# Altium PCB PCB1.PcbDoc
Units mm, origin at the board's own origin, x right, y up, seen from the top; angles counter-clockwise.
Board outline 60.07 x 31.75 mm, 2 copper layers (Top Layer, Bottom Layer); 35 components, 50 nets, 194 pads, 54 vias.
Unrouted connection lines stored in the file: 11.
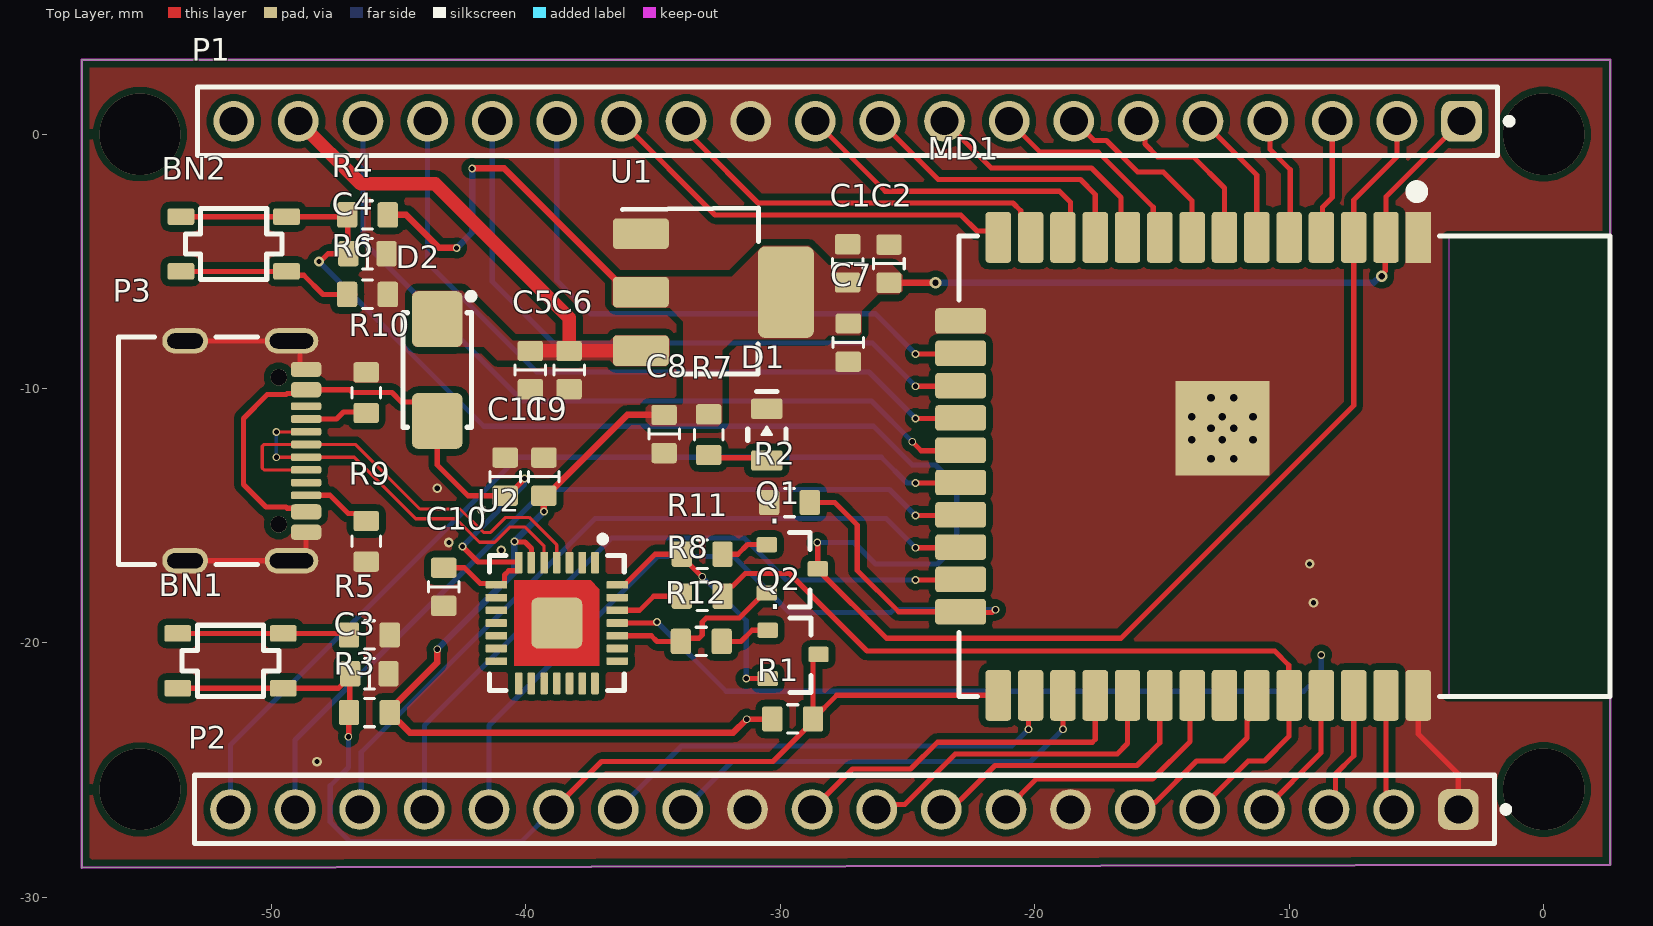
[diagram p0: Top Layer view]
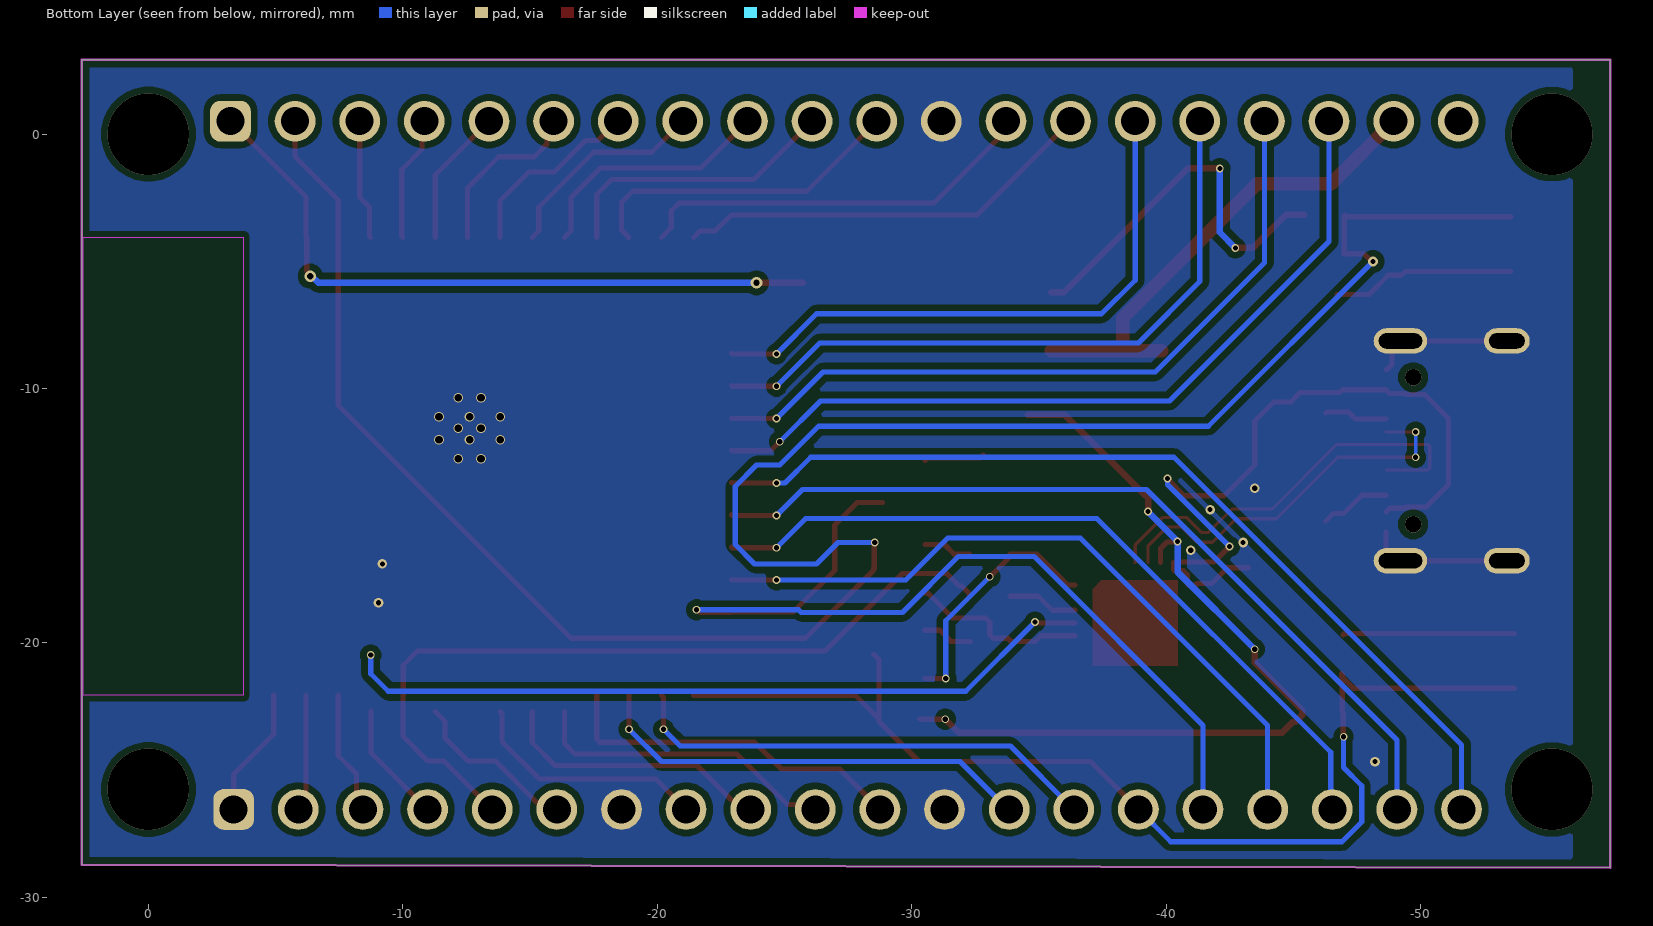
[diagram p1: Bottom Layer view, seen from below]
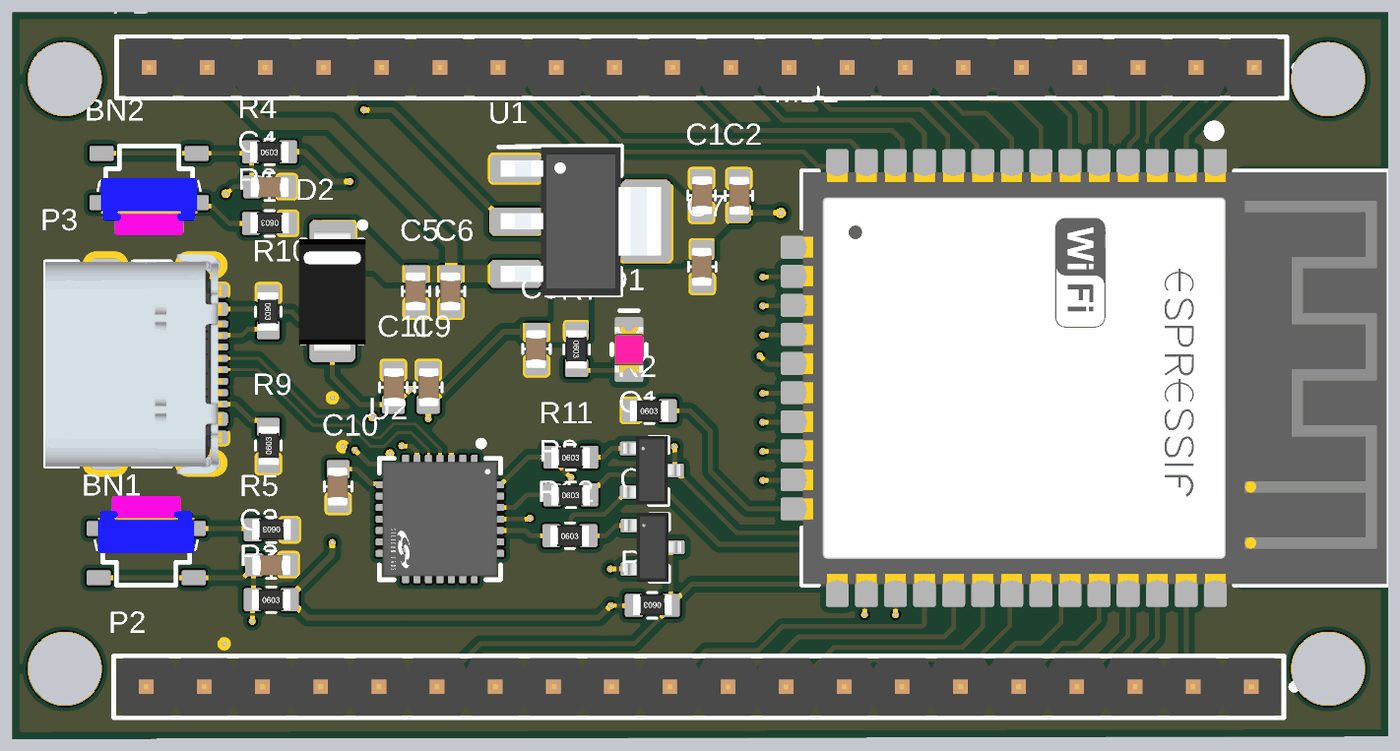
[diagram p2: 3D render of the assembled board from above, using the file's embedded part models]

## Layer stack, top to bottom
Top Solder: solder mask 0.0102, Solder Resist, Dk 3.5
Top Layer: signal copper 0.0356
Dielectric 1: dielectric 0.32, FR-4, Dk 4.8
Bottom Layer: signal copper 0.0356
Bottom Solder: solder mask 0.0102, Solder Resist, Dk 3.5

## Board outline
-57.455,-28.832 -57.455,2.921 2.616,2.921 2.616,-28.708

## Design rules (kind name [scope] priority, off if disabled: settings)
Clearance [All] p1: gap=0.254 ignorepadtopadclearanceinfootprint=FALSE
DiffPairsRouting [InDifferentialPairClass('New Class')] p1: maxlimit=0.127 minlimit=0.127 mostfreqgap=0.127 toplayer_minwidth=0.277 toplayer_maxwidth=0.277 toplayer_prefwidth=0.277 bottomlayer_minwidth=0.277 bottomlayer_maxwidth=0.277 bottomlayer_prefwidth=0.277 impedanceprofiledriven=TRUE impedanceprofileid={9CC0AA3F-7C3E-491D-B543-20747BA928EE} impedanceprofilevalue=90.000000 maxuncoupledlength=12.7
PolygonConnect [All] p1: connectstyle=Direct reliefconductorwidth=0.254 reliefentries=4 polygonreliefangle="90 Angle" airgapwidth=0.254
RoutingVias [InNetClass('All Nets')] p1: holewidth=0.203 width=0.305 viastyle="Through Hole" minholewidth=0.203 minwidth=0.305 maxholewidth=0.203 maxwidth=0.305 viatemplateguid#1={E89F5CC9-6383-4E06-893D-726549EC8DC4} viatemplatename#1=v38h30
SolderMaskExpansion [All] p1: expansion=0.102 istentingtop=FALSE
SupplyNets "Schematic Supply Nets_3" [InNet('EXT_5V')] p1: voltage=0.000
SupplyNets "Schematic Supply Nets_2" [InNet('+3V3')] p2: voltage=0.000
SupplyNets "Schematic Supply Nets_1" [InNet('GND')] p3: voltage=0.000
Width [InNetClass('50ohm')] p1: maxlimit=0.535 minlimit=0.535 preferedwidth=0.535 impedanceprofiledriven=TRUE impedanceprofileid={D5905C2B-C446-428B-AADE-5B11549CC50C} impedanceprofilevalue=50.000000 minimp=50.000000 maximp=50.000000 favimp=50.000000
29 further rules are at their usual default settings.

## Classes and differential pairs
component class Designator: BN1 BN2 C1 C2 C3 C4 MD1 P1 P2 R1 R2 R3 R4 R5 R6
differential pair D: +D_P -D_N

## Components (designator, comment, footprint, x,y, rotation, side; value= is the part's Value field where it differs from the comment)
BN1 "SKRPABE010" BTN_SKRPABE010 -51.613,-20.701 r0 top
BN2 "SKRPABE010" BTN_SKRPABE010 -51.486,-4.318 r180 top
C1 "22uF" CAP_0603 -27.356,-5.08 r270 top
C2 "0.1uF" CAP_0603 -25.73,-5.092 r270 top
C3 "1uF" CAP_0603 -46.152,-21.209 r180 top
C4 "1uF" CAP_0603 -46.228,-4.699 r180 top
C5 "10uF" CAP_0603 -39.827,-9.271 r90 top
C6 "100nF" CAP_0603 -38.303,-9.271 r90 top
C7 "10uF" CAP_0603 -27.33,-8.192 r90 top
C8 "100nF" CAP_0603 -34.569,-11.786 r90 top
C9 "1uF" CAP_0603 -39.294,-13.462 r270 top
C10 "10nF" CAP_0603 -43.231,-17.792 r90 top
C11 "100nF" CAP_0603 -40.818,-13.462 r270 top
D1 "LED RED" LED_RED_V0805 -30.531,-11.811 r90 top
D2 "SS34" DIO_SMA -43.485,-9.271 r270 top
MD1 "ESP32-WROOM-32D" MD_ESP32_WROOM_D -12.624,-11.557 r270 top
P1 "61302011121" 61302011121 -27.356,0.508 r180 top
P2 "61302011121" 61302011121 -27.483,-26.543 r180 top
P3 "USB_2.0_TYPE-C" CON_USB_2.0_TYPE-C -52.248,-12.446 r270 top
Q1 "BC846x" "BJT_ BC846x" -29.531,-17.084 r0 top
Q2 "BC846x" "BJT_ BC846x" -29.499,-20.447 r0 top
R1 "5K" RES_0603 -29.515,-22.987 r180 top
R2 "5K" RES_0603 -29.642,-14.478 r0 top
R3 "10k" RES_0603 -46.152,-22.733 r0 top
R4 "10k" RES_0603 -46.228,-3.175 r0 top
R5 "330" RES_0603 -46.152,-19.685 r180 top
R6 "330" RES_0603 -46.228,-6.299 r180 top
R7 "220" RES_0603 -32.817,-11.811 r270 top
R8 "470" RES_0603 -33.071,-18.161 r0 top
R9 "5.1K" RES_0603 -46.279,-16.002 r90 top
R10 "5.1K" RES_0603 -46.279,-10.16 r270 top
R11 "12K" RES_0603 -33.071,-16.51 r0 top
R12 "12K" RES_0603 -33.109,-19.939 r0 top
U1 "+3V3" PWR_LD1117_SOT223 -32.634,-6.209 r0 top
U2 "CP2102" INF_CP2102 -38.786,-19.215 r270 top

## Footprints (in the part's own frame and the unit in brackets; to place one, negate y for a bottom-side part, rotate by r counter-clockwise, add the part's x,y. Pads: shape width x height; smd on the part's side, far side on the other; paste and mask are expansions set on the pad)
61302011121 [mm] "Pin Header, pitch 2.54 mm, THT, Vertical, single row, 20p"
  rrect50% 1.6x1.6 hole 1.1: 1(-24.13,0)
  round 1.6 hole 1.1: 2(-21.59,0) 3(-19.05,0) 4(-16.51,0) 5(-13.97,0) 6(-11.43,0) 7(-8.89,0) 8(-6.35,0) 9(-3.81,0) 10(-1.27,0) 11(1.27,0) 12(3.81,0) 13(6.35,0) 14(8.89,0) 15(11.43,0) 16(13.97,0) 17(16.51,0) 18(19.05,0) 19(21.59,0) 20(24.13,0)
  silkscreen extent -26.12,-1.35 25.55,1.35, body extent -25.4,-1.27 25.4,1.27, height 8.57
"BJT_ BC846x" [mm]
  rrect25% 0.8x0.6 smd mask+0.05: 1(-1,0.95) 2(-1,-0.95) 3(1,0)
  silkscreen extent -0.11,-1.5 0.7,1.43, body extent -1.24,-1.5 1.24,1.5, height 1.09
BTN_SKRPABE010 [mm]
  rrect25% 1.05x0.65 smd: 12(-2.075,1.075) 12(2.075,1.075) 34(-2.075,-1.075) 34(2.075,-1.075)
  silkscreen extent -1.9,-1.4 1.9,1.4, body extent -2.3,-1.6 2.3,1.6, height 2.51
CAP_0603 [mm]
  rrect25% 0.8x1 smd: 1(-0.75,0) 2(0.75,0)
  silkscreen extent -0.2,-0.6 0.2,0.6, body extent -0.85,-0.43 0.85,0.47, height 0.9
CON_USB_2.0_TYPE-C [mm]
  rrect50% 0.6x1.2 smd: A1/B12(-3.2,3.605) A4/B9(-2.4,3.605) A9/B4(2.4,3.605) A12/B1(3.2,3.605)
  rrect50% 0.3x1.2 smd: A5(-1.25,3.605) A6(-0.25,3.605) A7(0.25,3.605) A8(1.25,3.605) B5(1.75,3.605) B6(0.75,3.605) B7(-0.75,3.605) B8(-1.75,3.605)
  round 0.65 hole 0.65 unplated: MH1(-2.89,2.535) MH2(2.89,2.535)
  oval 1x2.1 hole 0.6 slot 1.7 at 90 deg: Shell(-4.32,3.035) Shell(4.32,3.035)
  oval 1x1.8 hole 0.6 slot 1.4 at 90 deg: Shell(-4.32,-1.145) Shell(4.32,-1.145)
  silkscreen extent -4.47,-3.76 4.47,1.7, body extent -4.79,-3.76 4.79,3.95, height 3.33
DIO_SMA [mm] "Molded Diode, 2-Leads, Body 4.25x2.50mm, IPC Medium Density"
  rrect25% 2.2x2 smd: A(2,0) C(-2,0)
  silkscreen extent -3.02,-1.35 2.25,1.45, body extent -2.61,-1.46 2.67,1.46, height 2.41
INF_CP2102 [mm]
  rrect25% 0.85x0.3 smd: 1(-2.375,1.5) 2(-2.375,1) 3(-2.375,0.5) 4(-2.375,0) 5(-2.375,-0.5) 6(-2.375,-1) 7(-2.375,-1.5) 15(2.375,-1.5) 16(2.375,-1) 17(2.375,-0.5) 18(2.375,0) 19(2.375,0.5) 20(2.375,1) 21(2.375,1.5)
  rrect25% 0.3x0.85 smd: 8(-1.5,-2.375) 9(-1,-2.375) 10(-0.5,-2.375) 11(0,-2.375) 12(0.5,-2.375) 13(1,-2.375) 14(1.5,-2.375) 22(1.5,2.375) 23(1,2.375) 24(0.5,2.375) 25(0,2.375) 26(-0.5,2.375) 27(-1,2.375) 28(-1.5,2.375)
  rrect25% 2x2 smd: 29(0,0)
  Top Layer region: -1.325,1.675 1.675,1.675 1.675,-1.675 -1.675,-1.675 -1.675,1.325 -1.325,1.675
  silkscreen extent -3.42,-2.65 2.65,2.65, body extent -2.98,-2.98 2.98,2.98, height 0.25
LED_RED_V0805 [mm]
  rrect25% 0.8x1.25 smd paste+0 mask+0: A(-1.016,0) C(1.016,0)
  silkscreen extent -0.22,-0.75 1.7,0.75, body extent -1.3,-0.85 1.3,0.85, height 0.25
MD_ESP32_WROOM_D [mm]
  rect 2x1 smd paste+0 mask+0: 1(-7.5,7.7)
  rrect25% 2x1 smd paste+0 mask+0: 2(-7.5,6.43) 3(-7.5,5.16) 4(-7.5,3.89) 5(-7.5,2.62) 6(-7.5,1.35) 7(-7.5,0.08) 8(-7.5,-1.19) 9(-7.5,-2.46) 10(-7.5,-3.73) 11(-7.5,-5) 12(-7.5,-6.27) 13(-7.5,-7.54) 14(-7.5,-8.81) 25(10.5,-8.81) 26(10.5,-7.54) 27(10.5,-6.27) 28(10.5,-5) 29(10.5,-3.73) 30(10.5,-2.46) 31(10.5,-1.19) 32(10.5,0.08) 33(10.5,1.35) 34(10.5,2.62) 35(10.5,3.89) 36(10.5,5.16) 37(10.5,6.43) 38(10.5,7.7)
  rrect25% 1x2 smd paste+0 mask+0: 15(-4.215,-10.29) 16(-2.945,-10.29) 17(-1.675,-10.29) 18(-0.405,-10.29) 19(0.865,-10.29) 20(2.135,-10.29) 21(3.405,-10.29) 22(4.675,-10.29) 23(5.945,-10.29) 24(7.215,-10.29)
  rect 3.7x3.7 smd paste+0 mask+0: 39(0,0)
  Keep-Out Layer region: -7.5,8.89 10.5,8.89 10.5,15.19 -7.5,15.19
  Keep-Out Layer region: -7.5,8.89 10.5,8.89 10.5,15.19 -7.5,15.19
  silkscreen extent -9.5,-10.36 10.55,15.24, body extent -7.5,-10.31 10.5,15.19, height 3.2
PWR_LD1117_SOT223 [mm]
  rrect25% 2.2x1.2 smd: 1(-2.85,2.3) 2(-2.85,0) 3(-2.85,-2.3)
  rrect25% 2.2x3.6 smd: 4(2.85,0)
  silkscreen extent -3.57,-3.22 1.78,3.3, body extent -3.5,-3.25 3.5,3.25, height 1.8
RES_0603 [mm]
  rrect25% 0.8x1 smd: 1(-0.8,0) 2(0.8,0)
  silkscreen extent -0.2,-0.56 0.2,0.56, body extent -0.86,-0.47 0.84,0.43, height 0.56

## Part data
BN1 BN2: library part BTN_SKRPABE010, "3.2mm 2.5mm button 50mA Brick SPST 16V SMD Tactile Switches", JLCPCB Part=?, LCSC Part=?, Mfr.part=SKRPABE010
C1 C2 C3 C4 C5 C6 C7 C8 C9 C10 C11: library part CAP_0603, "0603 Multilayer Ceramic Capacitors MLCC - SMD/SMT ROHS", JLCPCB Part=?, LCSC Part=?, Mfr. Part=?, Voltage=?
D1: library part LED_RED_V0805, "20mA 615nm~630nm RED", JLCPCB Part=?, LCSC Part=?, Mrf. Part=?
D2: library part DIO_SS34, "40V 500mV@3A 3A SMC (SBD)", JLCPCB Part=?, LCSC Part=?, Mfr. Part=?
MD1: library part MD_ESP32_WROOM_D, "core ESP32-D0WD, 32Mbits, 3.3V, 40Mhz, onboard antenna", JLCPCB Part=?, LCSCPCB Part=?, Mrf. Part=?
P1 P2: library part CMP-1502-01102-3, Color=Black, Contact Resistance=20mΩ, Current Rating=3A, Operating Supply Voltage=250V, Connector Type="Male Pin", Contact Material=Copper, Contact Mating Length=5.9944mm, Contact Plating=Gold, Gender=Male, Lead Pitch=2.54mm, Mount="Through Hole", NexarPartId=32855554, Number of Contacts=20, Number of Pins=20, Number of Positions=20, Number of Rows=1, Orientation=Vertical, Packaging=Bulk, Pitch=2.54mm, REACH SVHC=Unknown, RoHS=Compliant, Termination=Solder
P3: library part CON_USB_2.0_TYPE-C, "USB Connectors USB Jack 2.0, Type-C, Horizontal SMT", JLCPCB Part=?, LCSC Part=?, Mrf. Part=?
Q1 Q2: library part "BJT_ BC846x", "Single Bipolar Transistor, NPN, 65 V, 100 mA, 250 mW, SOT23 (TO-236AB), 3 Pins, Surface Mount", JLCPCB Part=?, LCSC Part=?, Mrf. Part=?
R1 R2 R3 R4 R5 R6 R7 R8 R9 R10 R11 R12: library part RES_0603, "0603 Thick Film Resistor - Surface Mount ROHS", JLCPCB Part=?, LCSC Part=?, Mfr. Part=?
U1: library part PWR_LD1117, "Linear Voltage Regulators (LDO)", JLCPCB Part=?, LCSC Part=?, Mrf. Part=?
U2: library part INF_CP2102, "USB to UART bridge USB 2.0 3.3V, CP2102-GMR, VFQFN-28", JLCPCB Part=?, Mrf. Part=?

## Via types
v1: diameter 0.305, hole 0.203, Top Layer to Bottom Layer, 28 vias
v2: diameter 0.381, hole 0.3, Top Layer to Bottom Layer, 12 vias
v3: diameter 0.381, hole 0.203, Top Layer to Bottom Layer, 8 vias
v4: diameter 3.2, hole 3.2, Top Layer to Bottom Layer, 4 vias
v5: diameter 0.457, hole 0.254, Top Layer to Bottom Layer, 2 vias

## Nets (pads, with @x,y where several pads share a name; then routed paths per layer and width w, separated by ;. In a path a pad name is that pad's centre, name@x,y a point inside that pad or via, vN(x,y) a via of type N, cw(c..) or ccw(c..) an arc to the next point about the centre after c; other vN are vias at no path point)
+3V3: C1.2 C2.2 C7.2 C8.2 C9.2 MD1.2 P1.1 R1.2 R3.2 R4.2 R7.1 U1.2 U1.4 U2.6 | length 76.1
  Top Layer w0.203: v1(-40.451,-16.012) -40.431,-16.031 -40.039,-16.031 -39.786,-16.284 U2.6 ; v1(-31.322,-22.996) -30.324,-22.996 R1.2 ; v5(-6.365,-5.58) -6.365,-5.511 -6.223,-5.37 -6.223,-4.086 MD1.2 -6.194,-2.46 P1.1
  Top Layer w0.254: R4.2 -44.704,-3.175 -43.409,-4.47 v1(-42.723,-4.47) ; v1(-43.485,-20.244) -43.495,-20.254 -43.495,-20.776 -45.352,-22.633 R3.2 -45.352,-22.833 -45.079,-23.106 -44.979,-23.106 -44.564,-23.52 -31.845,-23.52 v1(-31.322,-22.996) ; v1(-42.113,-1.346) -40.847,-1.346 -35.984,-6.209 U1.2 ; v1(-39.294,-14.834) C9.2 ; C9.2@-39.194,-14.212 -36.017,-11.036 C8.2 ; C2.2 v5(-23.901,-5.842)
  Bottom Layer w0.254: v1(-43.485,-20.244) -40.451,-17.21 v1(-40.451,-16.012) -40.451,-16.001 -39.294,-14.844 v1(-39.294,-14.834) ; v1(-42.723,-4.47) -42.113,-3.861 v1(-42.113,-1.346) ; v5(-23.901,-5.842) -6.682,-5.842 -6.42,-5.58 v5(-6.365,-5.58)
CLK: MD1.20 P2.20 | length 36.4
  Top Layer w0.203: v1(-24.689,-13.716) -22.938,-13.716 MD1.20
  Bottom Layer w0.203: P2.20 -51.613,-24.003 -40.31,-12.7 -26.035,-12.7 -25.019,-13.716 v1(-24.689,-13.716)
CMD: MD1.19 P1.18 | length 31.6
  Top Layer w0.203: v1(-24.816,-12.09) -24.46,-12.446 -22.938,-12.446 MD1.19
  Bottom Layer w0.203: P1.18 -46.406,-4.216 -40.132,-10.49 -26.416,-10.49 v1(-24.816,-12.09)
D_N: P3.A7 P3.B7 U2.5 | length 15.3
  Top Layer w0.127: v1(-49.809,-11.709) -49.803,-11.703 -48.649,-11.703 P3.B7 ; v1@-49.807,-12.698 P3.A7@-48.645,-12.698 ; P3.A7 -46.744,-12.696 -44.327,-15.113 -42.748,-15.113 -41.826,-16.036 -41.231,-16.036 -40.638,-15.443 -40.034,-15.443 -39.286,-16.191 U2.5
  Bottom Layer w0.127: v1(-49.809,-12.7) v1(-49.809,-11.709)
D_P: P3.A6 P3.B6 U2.4 | length 17.7
  Top Layer w0.127: P3.B6@-48.647,-13.2 -50.292,-13.2 -50.366,-13.126 -50.366,-12.27 -50.292,-12.196 -46.705,-12.196 -44.169,-14.732 -42.59,-14.732 -41.668,-15.655 -41.388,-15.655 -40.796,-15.062 -39.876,-15.062 -38.775,-16.164 -38.775,-16.829 U2.4 -38.786,-16.164
DTR: Q2.2 R11.1 U2.28 | length 9.8
  Top Layer w0.203: U2.28 -36.136,-17.715 -34.931,-16.51 R11.1 -33.871,-16.61 -33.082,-17.399 v1(-33.071,-17.399) ; v1(-31.341,-21.391) -31.336,-21.397 Q2.2
  Bottom Layer w0.203: v1(-33.071,-17.399) -31.341,-19.129 v1(-31.341,-21.391)
EN: BN2.34 C4.2 MD1.3 P1.2 Q1.3 R4.1 | length 85.5
  Top Layer w0.203: BN2.34@-53.561,-3.243 -49.411,-3.243 -47.096,-3.243 R4.1 -47.003,-3.2 -47.003,-4.674 C4.2 -47.78,-4.699 -48.085,-5.004 v3(-48.133,-5.004) ; v1(-28.55,-16.053) -28.531,-16.072 Q1.3 -28.499,-17.052 -28.499,-17.145 -25.832,-19.812 -16.612,-19.812 -7.464,-10.664 MD1.3 -7.464,-2.587 -5.766,-0.889 P1.2
  Bottom Layer w0.203: v3(-48.133,-5.004) -41.656,-11.481 -26.34,-11.481 -24.816,-13.005 -23.901,-13.005 -23.063,-13.843 -23.063,-16.129 -23.825,-16.891 -26.264,-16.891 -27.102,-16.053 v1(-28.55,-16.053)
EXT_5V: C5.2 C6.2 D2.C P1.19 P1.20 U1.3 | length 19.5
  Top Layer w0.533: P1.19 -46.482,-1.956 -43.561,-1.956 -38.303,-7.214 C6.2 ; C5.2 C6.2 ; U1.3 -35.49,-8.515 -38.297,-8.515 C6.2
GND: C1.1 C2.1 C3.1 C4.1 C5.1 C6.1 C7.1 C8.1 C9.1 C10.1 C11.1 D1.C MD1.1 MD1.15 MD1.38 MD1.39 P1.12 P2.1 P2.7 P2.12 P3.A1/B12 P3.A12/B1 P3.Shell R2.1 R5.1 R6.1 R9.1 R10.1 U1.1 U2.3 | length 16.4
  Top Layer w0.203: P3.Shell@-53.393,-16.766 -49.213,-16.766 -49.011,-16.766 -48.643,-16.398 P3.A12/B1 ; P3.Shell@-53.393,-8.126 -49.213,-8.126 -48.878,-8.461 -48.878,-9.051 -48.683,-9.246 P3.A1/B12 ; MD1.38 -4.924,-23.575 -3.353,-25.146 P2.1
  other v2: -13.074,-12.757 -12.174,-12.757 -13.824,-12.007 -12.624,-12.007 -11.424,-12.007 -13.074,-11.557 -12.174,-11.557 -13.824,-11.107 -12.624,-11.107 -11.424,-11.107 -13.074,-10.357 -12.174,-10.357
  other v3: -48.209,-24.663 -9.042,-18.415 -9.195,-16.891 -40.97,-16.358 -43.028,-16.053 -41.732,-14.757 -43.485,-13.919
IO0: BN1.34 C3.2 MD1.25 P2.15 Q2.3 R1.1 R3.1 | length 44.9
  Top Layer w0.203: BN1.34@-53.688,-21.776 -49.538,-21.776 -47.369,-21.776 -46.902,-21.309 C3.2 -46.927,-21.234 -46.927,-22.708 -46.965,-22.747 -46.965,-23.67 v1(-46.979,-23.684) ; P2.15 -37.033,-24.663 -30.291,-24.663 -28.715,-23.087 R1.1 ; Q2.3 -28.516,-20.447 -28.715,-20.645 R1.1 ; MD1.25 -27.785,-22.057 R1.1
  Bottom Layer w0.203: v1(-46.979,-23.684) -46.979,-24.899 -47.688,-25.609 -47.688,-27.038 -46.914,-27.813 -40.183,-27.813 P2.15
IO2: MD1.24 P2.16 R2.2 | length 37.1
  Top Layer w0.203: R2.2 -27.864,-14.478 -26.975,-15.367 -26.975,-17.145 -25.348,-18.772 MD1.24 -22.89,-18.796 -21.676,-18.796 -21.575,-18.694 v1(-21.547,-18.694)
  Bottom Layer w0.203: P2.16 -41.453,-23.241 -34.806,-16.594 -31.844,-16.594 -29.642,-18.796 -25.659,-18.796 -25.557,-18.694 v1(-21.547,-18.694)
IO4: MD1.26 P2.14 | length 18.8
  Top Layer w0.203: v1(-20.244,-23.393) -20.244,-22.137 MD1.26
  Bottom Layer w0.203: P2.14 -33.884,-24.054 -20.904,-24.054 v1(-20.244,-23.393)
IO5: MD1.29 P2.10 | length 12.2
  Top Layer w0.203: P2.10 -26.014,-26.344 -25.108,-26.344 -23.123,-24.359 -16.756,-24.359 -16.354,-23.956 MD1.29@-16.354,-22.692
IO12: MD1.14 P1.14 | length 16.7
  Top Layer w0.203: P1.14 -32.563,-3.175 -22.911,-3.175 -22.276,-3.81 -21.681,-3.81 MD1.14
IO13: MD1.16 P1.15 | length 23.3
  Top Layer w0.203: v1(-24.689,-8.636) -22.938,-8.636 MD1.16
  Bottom Layer w0.203: P1.15 -38.786,-5.74 -37.465,-7.061 -26.264,-7.061 v1(-24.689,-8.636)
IO14: MD1.13 P1.13 | length 16
  Top Layer w0.203: P1.13 -33.706,0.13 -33.318,-0.257 -33.318,-0.261 -30.877,-2.701 -20.86,-2.701 -20.548,-3.013 -20.548,-3.673 MD1.13
IO15: MD1.23 P2.17 | length 28.1
  Top Layer w0.203: v1(-24.689,-17.526) -22.938,-17.526 MD1.23
  Bottom Layer w0.203: P2.17 -43.993,-23.241 -36.627,-15.875 -31.42,-15.875 -29.769,-17.526 v1(-24.689,-17.526)
IO16: MD1.27 P2.13 | length 17.6
  Top Layer w0.203: v1(-18.894,-23.393) MD1.27
  Bottom Layer w0.203: P2.13 -33.782,-26.543 -31.902,-24.663 -20.164,-24.663 v1(-18.894,-23.393)
IO17: MD1.28 P2.11 | length 14
  Top Layer w0.203: P2.11 -27.165,-24.956 -24.879,-24.956 -23.825,-23.901 -17.743,-23.901 -17.624,-23.782 MD1.28
IO18: MD1.30 P2.9 | length 10.9
  Top Layer w0.203: P2.9 -23.295,-26.543 -22.907,-26.155 -22.904,-26.155 -21.565,-24.816 -15.977,-24.816 -15.084,-23.923 MD1.30@-15.084,-22.692
IO19: MD1.31 P2.8 | length 9.6
  Top Layer w0.203: P2.8 -19.939,-25.349 -15.367,-25.349 -13.896,-23.878 -13.896,-22.774 MD1.31@-13.814,-22.692
IO21: MD1.33 P2.6 | length 6.8
  Top Layer w0.203: P2.6 -15.786,-26.276 -15.278,-26.276 -13.64,-24.638 -12.56,-24.638 -11.658,-23.736 -11.658,-23.076 MD1.33@-11.274,-22.692
IO22: MD1.36 P2.3 | length 4.9
  Top Layer w0.203: P2.3 -8.179,-26.289 -8.179,-25.146 -7.464,-24.431 MD1.36
IO23: MD1.37 P2.2 | length 4.6
  Top Layer w0.203: MD1.37 -6.194,-25.864 -5.893,-26.165 P2.2
IO25: MD1.10 P1.9 | length 9.9
  Top Layer w0.203: P1.9 -21.708,-1.33 -17.771,-1.33 -16.611,-2.49 -16.611,-3.8 MD1.10
IO26: MD1.11 P1.10 | length 11.3
  Top Layer w0.203: P1.10 -23.791,-1.787 -18.203,-1.787 -17.624,-2.366 MD1.11
IO27: MD1.12 P1.11 | length 12.9
  Top Layer w0.203: P1.11 -25.874,-2.244 -19.027,-2.244 -18.599,-2.673 -18.599,-3.762 MD1.12
IO32: MD1.8 P1.7 | length 7.4
  Top Layer w0.203: P1.7 -18.427,0.508 -17.665,-0.254 -17.184,-0.254 -15.954,-1.484 -14.95,-1.484 -13.814,-2.62 MD1.8
IO33: MD1.9 P1.8 | length 8.4
  Top Layer w0.203: P1.8 -19.787,-0.711 -17.501,-0.711 -15.341,-2.871 -15.341,-3.8 MD1.9
IO34: MD1.6 P1.5 | length 5.4
  Top Layer w0.203: P1.5 -11.274,-1.604 MD1.6
IO35: MD1.7 P1.6 | length 6.8
  Top Layer w0.203: P1.6 -15.665,0.247 -15.665,-0.388 -15.164,-0.889 -13.767,-0.889 -12.544,-2.112 MD1.7
NetBN1_12: BN1.12 R5.2 | length 6.8
  Top Layer w0.203: BN1.12@-53.688,-19.626 -49.538,-19.626 -47.011,-19.626 R5.2
NetBN2_12: BN2.12 R6.2 | length 7.2
  Top Layer w0.203: BN2.12@-53.561,-5.393 -49.411,-5.393 -49.259,-5.545 -48.735,-5.545 -47.981,-6.299 R6.2@-46.717,-6.299
NetD1_A: D1.A R7.2 | length 2.4
  Top Layer w0.203: R7.2 -32.709,-12.719 -30.639,-12.719 D1.A
NetP3_A5: P3.A5 R10.2 | length 2.5
  Top Layer w0.203: P3.A5 -47.442,-11.196 -47.168,-10.922 -46.317,-10.922 R10.2
NetP3_B5: P3.B5 R9.2 | length 2.8
  Top Layer w0.203: P3.B5 -47.704,-14.196 -46.996,-14.904 -46.577,-14.904 R9.2
NetQ1_1: Q1.1 R11.2 | length 1.9
  Top Layer w0.203: R11.2 -31.674,-16.51 -31.293,-16.129 -30.536,-16.129 Q1.1
NetQ2_1: Q2.1 R12.2 | length 2
  Top Layer w0.203: R12.2 -31.547,-19.939 -31.105,-19.497 Q2.1
NetR8_1: R8.1 U2.26 | length 2.8
  Top Layer w0.203: U2.26 -35.53,-18.715 -34.976,-18.161 R8.1
NetU2_10,13,14,15,16,17,19,20,21,22: U2.10 U2.13 U2.14 U2.15 U2.16 U2.17 U2.19 U2.20 U2.21 U2.22
RTS: Q1.2 R12.1 U2.24 | length 7.1
  Top Layer w0.203: U2.24 -35.073,-19.715 -34.849,-19.939 R12.1 -33.782,-19.812 -33.198,-19.812 -33.071,-19.685 -33.071,-19.177 -32.91,-19.017 -31.613,-19.017 -30.631,-18.034 Q1.2
RXD0: MD1.34 P2.5 R8.2 | length 31.7
  Top Layer w0.203: R8.2 -32.271,-18.061 -31.972,-17.763 -31.872,-17.763 -31.382,-17.272 -29.642,-17.272 -26.594,-20.32 -10.566,-20.32 -10.015,-20.871 -10.015,-22.046 MD1.34 -10.004,-23.669 -10.973,-24.638 -11.608,-24.638 P2.5
SD0: MD1.21 P2.19 | length 33.4
  Top Layer w0.203: v1(-24.689,-14.986) -22.938,-14.986 MD1.21
  Bottom Layer w0.203: P2.19 -49.073,-23.818 -39.225,-13.97 -25.705,-13.97 v1(-24.689,-14.986)
SD1: MD1.22 P2.18 | length 30.1
  Top Layer w0.203: v1(-24.689,-16.256) -22.938,-16.256 MD1.22
  Bottom Layer w0.203: P2.18 -46.471,-26.481 -46.471,-24.297 -37.287,-15.113 -25.832,-15.113 v1(-24.689,-16.256)
SD2: MD1.17 P1.16 | length 26.4
  Top Layer w0.203: v1(-24.689,-9.906) -22.938,-9.906 MD1.17
  Bottom Layer w0.203: P1.16 -41.326,-5.791 -38.913,-8.204 -26.391,-8.204 v1(-24.689,-9.906)
SD3: MD1.18 P1.17 | length 29.1
  Top Layer w0.203: v1(-24.689,-11.176) -22.938,-11.176 MD1.18
  Bottom Layer w0.203: P1.17 -43.866,-5.057 -39.575,-9.347 -26.518,-9.347 v1(-24.689,-11.176)
SEN_VN: MD1.5 P1.4 | length 5
  Top Layer w0.203: P1.4 -10.757,0.419 -10.757,-0.597 -9.957,-1.397 -9.957,-4.01 MD1.5
SEN_VP: MD1.4 P1.3 | length 4.7
  Top Layer w0.203: MD1.4 -8.686,-4.009 -8.686,-2.871 -8.306,-2.492 P1.3
TXD0: MD1.35 P2.4 U2.25 | length 34.6
  Top Layer w0.203: U2.25 -34.914,-19.215 -34.876,-19.177 v1(-34.849,-19.177) ; v1(-10.973,-26.543) -8.744,-24.314 MD1.35@-8.744,-22.682
  Bottom Layer w0.203: v1(-34.849,-19.177) -32.126,-21.899 -9.427,-21.899 -8.738,-21.21 v1(-8.738,-20.472)
VBUS: C10.2 C11.2 D2.A P3.A4/B9 P3.A9/B4 U2.7 U2.8 | length 30.1
  Top Layer w0.203: P3.A9/B4 -48.787,-14.702 -49.385,-14.702 -49.431,-14.655 -50.216,-14.655 -51.105,-13.767 -51.105,-11.176 -50.165,-10.237 -49.431,-10.237 -49.385,-10.19 -48.787,-10.19 P3.A4/B9 -46.937,-10.046 -46.823,-10.16 -45.263,-10.16 -44.9,-10.523 -44.233,-10.523 D2.A -43.485,-13.005 -42.278,-14.212 C11.2 -40.718,-14.212 -40.056,-13.55 v1(-40.056,-13.538) ; C10.2 -42.419,-17.042 -41.795,-17.667 -41.209,-17.667 U2.8 -40.886,-17.715 -40.837,-17.667 -40.837,-17.329 -40.672,-17.163 -40.334,-17.163 -40.286,-17.115 U2.7 -40.309,-16.84 -40.334,-16.815 -41.885,-16.815 v1(-42.494,-16.205)
  Bottom Layer w0.203: v1(-42.494,-16.205) -40.062,-13.773 -40.062,-13.544 v1(-40.056,-13.538)
pads on no net: MD1.32 P3.A8 P3.B8 P3.MH1 P3.MH2 U2.1 U2.2 U2.9 U2.11 U2.12 U2.18 U2.23 U2.27 U2.29
copper on no net:
  other v4: -55.169,-25.756 0,-25.756 -55.169,0 0,0

## Polygon pours and split planes (outlines as drawn)
GND on Top Layer "GND_L01_P006" (solid, remove dead copper, pour order 6): -57.455,2.921 -57.455,-28.854 2.388,-28.854 2.616,-28.626 2.616,2.921
EXT_5V on Top Layer "EXT_5V_L01_P000" (solid, pour order 0): -44.475,-6.299 -44.475,-8.204 -44.323,-8.357 -41.656,-8.357 -41.123,-8.89 -36.703,-8.89 -36.474,-9.119 -34.493,-9.119 -34.341,-8.966 -34.341,-8.052 -34.493,-7.899 -36.474,-7.899 -36.703,-8.128 -40.513,-8.128 -42.494,-6.147 -44.323,-6.147 -42.494,-6.147 -44.323,-6.147
+3V3 on Top Layer "+3V3_L01_P005" (solid, remove dead copper, pour order 5): -33.503,-5.613 -31.902,-5.613 -30.683,-4.394 -28.854,-4.394 -28.092,-5.156 -25.578,-5.156 -25.197,-5.537 -25.197,-6.147 -25.349,-6.299 -26.157,-6.299 -26.797,-6.939 -26.797,-7.823 -26.873,-7.899 -27.788,-7.899 -28.092,-7.899 -28.245,-8.052 -31.674,-8.052 -31.826,-8.052 -32.512,-8.738 -32.664,-8.738 -32.664,-7.137 -33.96,-5.842
+3V3 on Top Layer "+3V3_L01_P002" (solid, remove dead copper, pour order 2): -36.474,-5.613 -36.627,-5.766 -36.627,-6.68 -36.474,-6.833 -34.341,-6.833 -33.807,-7.366 -33.807,-10.566 -33.884,-10.643 -35.179,-10.643 -35.293,-10.757 -35.293,-11.29 -35.103,-11.481 -32.436,-11.481 -32.283,-11.328 -32.283,-6.833 -33.503,-5.613
GND on Bottom Layer "GND_L02_P007" (solid, remove dead copper, pour order 7): -55.753,2.921 -56.058,2.616 -55.982,2.54 -55.982,-28.931 2.007,-28.931 2.692,-28.245 2.54,-28.092 2.54,2.921

## Keep-outs
Keep-Out Layer:
  the board outline again, w0.1